# Altium PCB Copy of Sensor_board.PcbDoc
Units mil, origin at the board's own origin, x right, y up, seen from the top; angles counter-clockwise.
Board outline 4712.5 x 1045 mil, 2 copper layers (Top Layer, Bottom Layer); 60 components, 50 nets, 176 pads, 0 vias.
Unrouted connection lines stored in the file: 3.
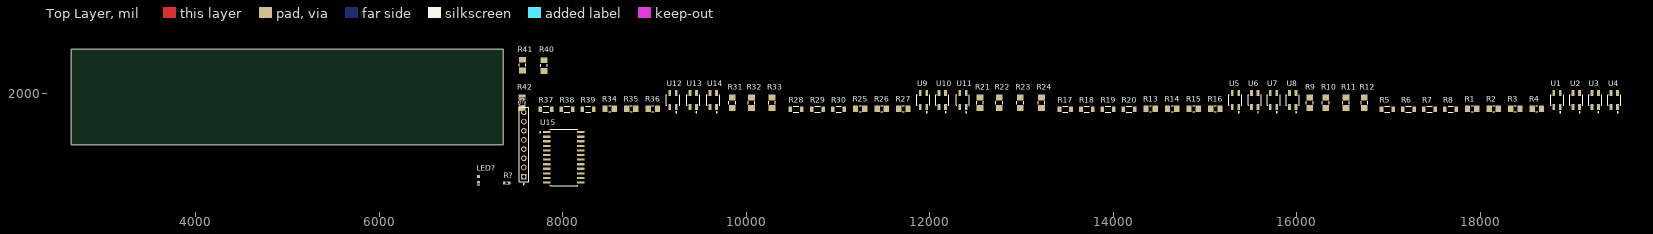
[diagram p0: Top Layer view]
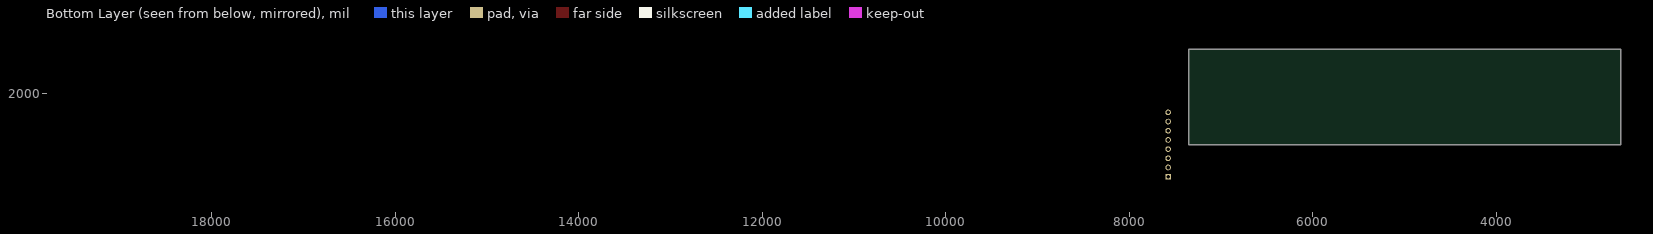
[diagram p1: Bottom Layer view, seen from below]

## Layer stack, top to bottom
Top Solder: solder mask 0.4, Solder Resist, Dk 3.5
Top Layer: signal copper 1.4
Dielectric 1: dielectric 12.6, FR-4, Dk 4.8
Bottom Layer: signal copper 1.4
Bottom Solder: solder mask 0.4, Solder Resist, Dk 3.5

## Board outline
2640,1440 2640,2485 7352.5,2485 7352.5,1440

## Design rules (kind name [scope] priority, off if disabled: settings)
Clearance [All] p1: gap=10 ignorepadtopadclearanceinfootprint=FALSE
PolygonConnect [All] p1: connectstyle=Relief reliefconductorwidth=10 reliefentries=4 polygonreliefangle="90 Angle" airgapwidth=10
RoutingVias [All] p1: holewidth=28 width=50 viastyle="Through Hole" minholewidth=28 minwidth=50 maxholewidth=28 maxwidth=50
SolderMaskExpansion [All] p1: expansion=4 istentingtop=FALSE
SupplyNets "Schematic Supply Nets_15" [InNet('sense_8')] p1: voltage=0.000
SupplyNets "Schematic Supply Nets_14" [InNet('sense_14')] p2: voltage=0.000
SupplyNets "Schematic Supply Nets_13" [InNet('sense_5')] p3: voltage=0.000
SupplyNets "Schematic Supply Nets_12" [InNet('sense_9')] p4: voltage=0.000
SupplyNets "Schematic Supply Nets_11" [InNet('GND')] p5: voltage=0.000
SupplyNets "Schematic Supply Nets_10" [InNet('sense_13')] p6: voltage=0.000
SupplyNets "Schematic Supply Nets_9" [InNet('+5')] p7: voltage=0.000
SupplyNets "Schematic Supply Nets_8" [InNet('sense_6')] p8: voltage=0.000
SupplyNets "Schematic Supply Nets_7" [InNet('sense_3')] p9: voltage=0.000
SupplyNets "Schematic Supply Nets_6" [InNet('sense_1')] p10: voltage=0.000
SupplyNets "Schematic Supply Nets_5" [InNet('sense_12')] p11: voltage=0.000
SupplyNets "Schematic Supply Nets_4" [InNet('sense_2')] p12: voltage=0.000
SupplyNets "Schematic Supply Nets_3" [InNet('sense_4')] p13: voltage=0.000
SupplyNets "Schematic Supply Nets_2" [InNet('sense_7')] p14: voltage=0.000
SupplyNets "Schematic Supply Nets_1" [InNet('sense_11')] p15: voltage=0.000
SupplyNets "Schematic Supply Nets" [InNet('sense_10')] p16: voltage=0.000
Width [All] p1: maxlimit=10 minlimit=10 preferedwidth=10
30 further rules are at their usual default settings.

## Components (designator, comment, footprint, x,y, rotation, side; value= is the part's Value field where it differs from the comment)
J? "TSW-108-08-G-S" FP-TSW-108-08-G-S-MFG 7575,1445 r90 top
LED? "2V 20mA 0603 Red" 0603_A 7080,1065 r90 top
R1 "RNCP1206FTD200R" FP-RNCP1206-IPC_B 17910,1835 r0 top
R2 "RNCP1206FTD200R" FP-RNCP1206-IPC_B 18145,1835 r0 top
R3 "RNCP1206FTD200R" FP-RNCP1206-IPC_B 18380,1835 r0 top
R4 "RNCP1206FTD200R" FP-RNCP1206-IPC_B 18615,1835 r0 top
R5 "SR1206FR-7W22RL" FP-SR1206-MFG 16985,1830 r0 top value=22Ω
R6 "SR1206FR-7W22RL" FP-SR1206-MFG 17215,1830 r0 top value=22Ω
R7 "SR1206FR-7W22RL" FP-SR1206-MFG 17445,1830 r0 top value=22Ω
R8 "SR1206FR-7W22RL" FP-SR1206-MFG 17675,1830 r0 top value=22Ω
R9 "RMCF1206JG220R" FP-RMCF1206-IPC_A 16140,1900 r90 top
R10 "RMCF1206JG220R" FP-RMCF1206-IPC_A 16315,1900 r90 top
R11 "RMCF1206JG220R" FP-RMCF1206-IPC_A 16535,1900 r90 top
R12 "RMCF1206JG220R" FP-RMCF1206-IPC_A 16735,1900 r90 top
R13 "RNCP1206FTD200R" FP-RNCP1206-IPC_B 14405,1835 r0 top
R14 "RNCP1206FTD200R" FP-RNCP1206-IPC_B 14640,1835 r0 top
R15 "RNCP1206FTD200R" FP-RNCP1206-IPC_B 14875,1835 r0 top
R16 "RNCP1206FTD200R" FP-RNCP1206-IPC_B 15110,1835 r0 top
R17 "SR1206FR-7W22RL" FP-SR1206-MFG 13475,1830 r0 top value=22Ω
R18 "SR1206FR-7W22RL" FP-SR1206-MFG 13710,1830 r0 top value=22Ω
R19 "SR1206FR-7W22RL" FP-SR1206-MFG 13940,1830 r0 top value=22Ω
R20 "SR1206FR-7W22RL" FP-SR1206-MFG 14170,1830 r0 top value=22Ω
R21 "RMCF1206JG220R" FP-RMCF1206-IPC_A 12545,1900 r90 top
R22 "RMCF1206JG220R" FP-RMCF1206-IPC_A 12755,1900 r90 top
R23 "RMCF1206JG220R" FP-RMCF1206-IPC_A 12985,1900 r90 top
R24 "RMCF1206JG220R" FP-RMCF1206-IPC_A 13215,1900 r90 top
R25 "RNCP1206FTD200R" FP-RNCP1206-IPC_B 11240,1835 r0 top
R26 "RNCP1206FTD200R" FP-RNCP1206-IPC_B 11475,1835 r0 top
R27 "RNCP1206FTD200R" FP-RNCP1206-IPC_B 11710,1835 r0 top
R28 "SR1206FR-7W22RL" FP-SR1206-MFG 10540,1830 r0 top value=22Ω
R29 "SR1206FR-7W22RL" FP-SR1206-MFG 10775,1830 r0 top value=22Ω
R30 "SR1206FR-7W22RL" FP-SR1206-MFG 11005,1830 r0 top value=22Ω
R31 "RMCF1206JG220R" FP-RMCF1206-IPC_A 9845,1900 r90 top
R32 "RMCF1206JG220R" FP-RMCF1206-IPC_A 10055,1900 r90 top
R33 "RMCF1206JG220R" FP-RMCF1206-IPC_A 10280,1900 r90 top
R34 "RNCP1206FTD200R" FP-RNCP1206-IPC_B 8510,1835 r0 top
R35 "RNCP1206FTD200R" FP-RNCP1206-IPC_B 8745,1835 r0 top
R36 "RNCP1206FTD200R" FP-RNCP1206-IPC_B 8980,1835 r0 top
R37 "SR1206FR-7W22RL" FP-SR1206-MFG 7815,1830 r0 top value=22Ω
R38 "SR1206FR-7W22RL" FP-SR1206-MFG 8045,1830 r0 top value=22Ω
R39 "SR1206FR-7W22RL" FP-SR1206-MFG 8275,1830 r0 top value=22Ω
R40 "RMCF1206JG220R" FP-RMCF1206-IPC_A 7795,2305 r90 top
R41 "RMCF1206JG220R" FP-RMCF1206-IPC_A 7560,2310 r90 top
R42 "RMCF1206JG220R" FP-RMCF1206-IPC_A 7555,1900 r90 top
R? "150R 5% 0603(1608)" RESC0603(1608)_L 7390,1025 r0 top value="150.00 Ohm"
U1 "QRE1113GR" FP-100CY-MFG 18835,1930 r90 top
U2 "QRE1113GR" FP-100CY-MFG 19045,1930 r90 top
U3 "QRE1113GR" FP-100CY-MFG 19250,1930 r90 top
U4 "QRE1113GR" FP-100CY-MFG 19460,1930 r90 top
U5 "QRE1113GR" FP-100CY-MFG 15330,1930 r90 top
U6 "QRE1113GR" FP-100CY-MFG 15540,1930 r90 top
U7 "QRE1113GR" FP-100CY-MFG 15745,1930 r90 top
U8 "QRE1113GR" FP-100CY-MFG 15955,1930 r90 top
U9 "QRE1113GR" FP-100CY-MFG 11930,1930 r90 top
U10 "QRE1113GR" FP-100CY-MFG 12135,1930 r90 top
U11 "QRE1113GR" FP-100CY-MFG 12360,1930 r90 top
U12 "QRE1113GR" FP-100CY-MFG 9200,1930 r90 top
U13 "QRE1113GR" FP-100CY-MFG 9420,1930 r90 top
U14 "QRE1113GR" FP-100CY-MFG 9640,1930 r90 top
U15 "CD74HC4067M96" FP-DW0024A-MFG 8010,1305 r0 top

## Footprints (in the part's own frame and the unit in brackets; to place one, negate y for a bottom-side part, rotate by r counter-clockwise, add the part's x,y. Pads: shape width x height; smd on the part's side, far side on the other; paste and mask are expansions set on the pad)
0603_A [mm] "Chip LED, 2-Leads, Body 1.6x0.8mm, IPC Medium Density"
  rect 0.8x0.8 smd: 1(-0.8,0) 2(0.8,0)
  silkscreen extent -1.5,-0.3 -1.5,0.3, body extent -0.8,-0.4 0.8,0.4, height 0.7
FP-100CY-MFG [mm]
  rect 1.66x0.79 smd paste+0 mask+0: 1(-2,-0.9) 2(2,-0.9) 3(2,0.9) 4(-2,0.9)
  silkscreen extent -3.52,-1.8 1.45,1.8, body extent -2.93,-1.9 2.93,1.9, height 0.25
FP-DW0024A-MFG [mm]
  rect 2x0.6 smd paste-1000 mask+0: 1(-4.7,6.985) 2(-4.7,5.715) 3(-4.7,4.445) 4(-4.7,3.175) 5(-4.7,1.905) 6(-4.7,0.635) 7(-4.7,-0.635) 8(-4.7,-1.905) 9(-4.7,-3.175) 10(-4.7,-4.445) 11(-4.7,-5.715) 12(-4.7,-6.985) 13(4.7,-6.985) 14(4.7,-5.715) 15(4.7,-4.445) 16(4.7,-3.175) 17(4.7,-1.905) 18(4.7,-0.635) 19(4.7,0.635) 20(4.7,1.905) 21(4.7,3.175) 22(4.7,4.445) 23(4.7,5.715) 24(4.7,6.985)
  silkscreen extent -6.7,-7.8 3.8,7.8, body extent -5.8,-7.98 5.8,7.98, height 0.25
FP-RMCF1206-IPC_A [mil]
  rect 63.14x73.16 smd paste+0 mask+0: 1(-58.09,0) 2(58.09,0)
  silkscreen extent -15,-37 15,37, body extent -109,-56 109,56, height 10
FP-RNCP1206-IPC_B [mil]
  rect 57.26x67.17 smd paste+0 mask+0: 1(-50.23,0) 2(50.23,0)
  silkscreen extent -10,-34 10,34, body extent -89,-43 89,43, height 10
FP-SR1206-MFG [mm]
  rect 1x1.5 smd paste+0 mask+0: 1(-1.6,0) 2(1.6,0)
  silkscreen extent -0.72,-0.85 0.72,0.85, body extent -2.2,-0.95 2.2,0.95, height 0.25
FP-TSW-108-08-G-S-MFG [mm]
  rect 1.57x1.57 hole 1.02 paste-2539.97 mask+0: 1(-8.89,0)
  round 1.57 hole 1.02 paste-2539.97 mask+0: 2(-6.35,0) 3(-3.81,0) 4(-1.27,0) 5(1.27,0) 6(3.81,0) 7(6.35,0) 8(8.89,0)
  silkscreen extent -11.07,-1.34 10.35,1.34, body extent -10.45,-1.44 10.45,1.44, height 0.25
RESC0603(1608)_L [mm] "Chip Resistor, Body 1.6x0.8mm, IPC High Density"
  rect 0.7x0.9 smd: 1(-0.7,0) 2(0.7,0)
  silkscreen extent -0.05,-0.35 0.05,0.35, body extent -0.85,-0.47 0.85,0.47, height 0.6

## Part data
J?: library part CMP-02766-000001-1, "CONN HEADER VERT 8POS 2.54MM", Manufacturer=Samtec, Temperature="-55°C to +125°C", Temperature Range High=+125°C, Temperature Range Low=-55°C, Automotive=No, Category=Conn, ComponentLink2Description=Datasheet, ComponentLink2URL=http://suddendocs.samtec.com/catalog_english/tsw_th.pdf, Conn Gender=Male, Conn Orientation=Straight, Contact Material=Gold,Nickel, Device Class L1=Connectors, Device Class L2="Headers and Wire Housings", Device Class L3=unset, Digikey Description="CONN HEADER VERT 8POS 2.54MM", Footprint Url=http://suddendocs.samtec.com/prints/tsw-xxx-xx-x-x-xx-xxx-footprint.pdf, Height=8.71mm, Lead Free=Yes, Manufacturer Part Number=TSW-108-08-G-S, Mouser Description="TSW - Samtec 2.54mm Pin Header 13.46mm Overall Pin Length 5.08mm Tail", Number Of Contacts=8, Number Of Rows=1, Octopart=https://octopart.com/tsw-108-08-g-s-samtec-272653, Package=TSW-108-08-G-S, Pitch=2.54mm, RoHS=TRUE
LED?: library part CMP-1426-00001-1, "SMD mono-color Chip LED, WL-SMCW, Red", Color=Red, Manufacturer="Wuerth Elektronik", PartNumber=150060RS75000, ComponentLink1Description="Manufacturer URL", ComponentLink1URL=http://www.we-online.com, ComponentLink2Description=Datasheet, ComponentLink2URL=http://katalog.we-online.com/led/datasheet/150060RS75000.pdf, PackageReference=0603_A
R1 R2 R3 R4 R13 R14 R15 R16 R25 R26 R27 R34 R35 R36: library part CMP-26527-001516-1, "200Ω ±1% 0.5W 1206 High Power Anti-Sulfur Thin Film Chip Resistor", Case Code (Imperial)=1206, Case Code (Metric)=3216, Max Operating Temperature=155°C, Max Power Dissipation=500mW, Min Operating Temperature=-55°C, Resistance=200R, Resistor Type="Thin Film", Temperature Coefficient=100ppm/°C, Tolerance=1%, Case/Package=1206, Features="Moisture Resistant", Height=0.024inch, Lead Free="Lead Free", Length=0.122inch, Mount="Surface Mount", Number of Terminations=2, Packaging="Tape and Reel", RoHS Compliant=Yes, Series=RNCP, Width=0.059inch
R5 R6 R7 R8 R17 R18 R19 R20 R28 R29 R30 R37 R38 R39: library part CMP-03412-023562-1, "RES 22 OHM 1% 1/2W 1206", Manufacturer=Yageo, Package=SR1206, Power Rating=0.5W, Resistance=22Ω, Temperature="-55°C to +155°C", Temperature Range High=+155°C, Temperature Range Low=-55°C, Tolerance=0.01, Voltage Rating=200V, Automotive=Yes, Automotive Grade="Grade 0", Category=Res, ComponentLink2Description=Datasheet, ComponentLink2URL=http://www.yageo.com/documents/recent/PYu-SR_D_F%20tol_RoHS_L_3.pdf, Composition="Thick Film", Device Class L1="Passive Components", Device Class L2=Resistors, Device Class L3="Chip SMD Resistors", Digikey Description="RES 22 OHM 1% 1/2W 1206", Footprint Url=http://www.yageo.com/exep/pages/download/literatures/PYu-R_Mount_10.pdf, Height=0.65mm, Ipc Land Pattern Name=RESC310160X55, Lead Free=Yes, Manufacturer Part Number=SR1206FR-7W22RL, Octopart=https://octopart.com/sr1206fr-7w22rl-yageo-92673882, RoHS=TRUE, Series=SR
R9 R10 R11 R12 R21 R22 R23 R24 R31 R32 R33 R40 R41 R42: library part CMP-26527-005266-1, "220Ω ±5% 0.25W 1206 Thick Film Chip Resistor AEC-Q200 compliant", Case Code (Imperial)=1206, Case Code (Metric)=3216, Max Operating Temperature=155°C, Max Power Dissipation=250mW, Min Operating Temperature=-55°C, Package Quantity=10000, Resistance=220R, Resistor Type="Thick Film", Temperature Coefficient=200ppm/°C, Tolerance=5%, Case/Package=1206, Contact Plating=Tin, Features="Automotive AEC-Q200", Height=0.028inch, Length=0.126inch, Mount="Surface Mount", Number of Terminations=2, Packaging="Tape and Reel", Radiation Hardening=No, RoHS Compliant=Yes, Series=RMCF, Width=0.063inch
R?: library part CMP-1012-00054-1, "150R 0.1W 5% 0603 (1608 Metric)  SMD", Case-EIA=0603, Case-Metric=1608, Power="0.1 W", Tolerance="5 %", Technology=SMT
U1 U2 U3 U4 U5 U6 U7 U8 U9 U10 U11 U12 U13 U14: library part CMP-2000-06919-2, "SENSOR OPTO TRANS REFL SMD PHOTO", Case/Package=SMD/SMT, Collector Emitter Breakdown Voltage=30V, Forward Current=50mA, Forward Voltage=1.2V, Max Collector Current=20mA, Max Operating Temperature=85°C, Max Power Dissipation=75mW, Min Operating Temperature=-40°C, Operating Supply Voltage=1.7V, Package Quantity=1000, Reverse Breakdown Voltage=5V, Collector Emitter Voltage (VCEO)=30V, Contact Plating=Tin, Fall Time=20us, Height=1.7mm, Input Current=50mA, Lead Free="Lead Free", Length=3.6mm, Max Breakdown Voltage=30V, Mount="Surface Mount", Number of Channels=1, Number of Elements=1, Number of Pins=4, Output Type=Phototransistor, Packaging="Tape and Reel", Power Dissipation=75mW, Radiation Hardening=No, REACH SVHC="No SVHC", Response Time=20us, Reverse Voltage (DC)=5V, Rise Time=20us, Sensing Distance=0.197inch, Wavelength=940nm, Weight=0.078g, Width=2.9mm
U15: library part CMP-04901-000007-1, "IC MUX/DEMUX 1X16 24SOIC", Ambient Temperature Range High=+125°C, Ambient Temperature Range Low=-55°C, Manufacturer="Texas Instruments", Max Junction Temp=+150°C, Max Supply Voltage=6V, Min Supply Voltage=2V, Package=DW0024A, Quiescent Current=8uA, Temperature="-55°C to +125°C", Automotive=No, Category=IC, ComponentLink2Description=Datasheet, ComponentLink2URL=http://www.ti.com/lit/ds/symlink/cd74hc4067.pdf, Device Class L1="Integrated Circuits (ICs)", Device Class L2="Logic ICs", Device Class L3=Multiplexers, Digikey Description="IC MUX/DEMUX 1X16 24SOIC", Height=2.65mm, Ipc Land Pattern Name=SOIC127P1030X265-24, Lead Free=Yes, Logic Function Desc=Non-Inverting, Manufacturer Part Number=CD74HC4067M96, Mouser Description="Multiplexer Switch ICs Hi-Spd CMOS 16Ch Anl Mltplxr/Demltplxr", Number Of Circuits=1, Number Of Inputs=16, Number Of Outputs=1, Octopart=https://octopart.com/cd74hc4067m96-texas+instruments-722802, Propagation Delay=6ns, RoHS=TRUE, Standoff Height=0.1mm, Temperature Range High=+125°C, Temperature Range Low=-55°C

## Nets (pads, with @x,y where several pads share a name; then routed paths per layer and width w, separated by ;. In a path a pad name is that pad's centre, name@x,y a point inside that pad or via, vN(x,y) a via of type N, cw(c..) or ccw(c..) an arc to the next point about the centre after c; other vN are vias at no path point)
+5: U15.24
GND: U15.12 U15.15 U15.16 U15.17
MUX_OUTPUT: U15.1
NetLED?_2: 
NetR1_1: 
NetR2_1: 
NetR3_1: 
NetR4_1: 
NetR5_1: 
NetR6_1: 
NetR7_1: 
NetR8_1: 
NetR13_1: 
NetR14_1: 
NetR15_1: 
NetR16_1: 
NetR17_1: 
NetR18_1: 
NetR19_1: 
NetR20_1: 
NetR25_1: 
NetR26_1: 
NetR27_1: 
NetR28_1: 
NetR29_1: 
NetR30_1: 
NetR34_1: 
NetR35_1: 
NetR36_1: 
NetR37_1: 
NetR38_1: 
NetR39_1: 
SENS_MUX_A: U15.10
SENS_MUX_B: U15.11
SENS_MUX_C: U15.14
SENS_MUX_D: U15.13
sense_1: U15.9
sense_2: U15.8
sense_3: U15.7
sense_4: U15.6
sense_5: U15.5
sense_6: U15.4
sense_7: U15.3
sense_8: U15.2
sense_9: U15.23
sense_10: U15.22
sense_11: U15.21
sense_12: U15.20
sense_13: U15.19
sense_14: U15.18
pads on no net: J?.1 J?.2 J?.3 J?.4 J?.5 J?.6 J?.7 J?.8 LED?.1 LED?.2 R1.1 R1.2 R2.1 R2.2 R3.1 R3.2 R4.1 R4.2 R5.1 R5.2 R6.1 R6.2 R7.1 R7.2 R8.1 R8.2 R9.1 R9.2 R10.1 R10.2 R11.1 R11.2 R12.1 R12.2 R13.1 R13.2 R14.1 R14.2 R15.1 R15.2 R16.1 R16.2 R17.1 R17.2 R18.1 R18.2 R19.1 R19.2 R20.1 R20.2 R21.1 R21.2 R22.1 R22.2 R23.1 R23.2 R24.1 R24.2 R25.1 R25.2 R26.1 R26.2 R27.1 R27.2 R28.1 R28.2 R29.1 R29.2 R30.1 R30.2 R31.1 R31.2 R32.1 R32.2 R33.1 R33.2 R34.1 R34.2 R35.1 R35.2 R36.1 R36.2 R37.1 R37.2 R38.1 R38.2 R39.1 R39.2 R40.1 R40.2 R41.1 R41.2 R42.1 R42.2 R?.1 R?.2 U1.1 U1.2 U1.3 U1.4 U2.1 U2.2 U2.3 U2.4 U3.1 U3.2 U3.3 U3.4 U4.1 U4.2 U4.3 U4.4 U5.1 U5.2 U5.3 U5.4 U6.1 U6.2 U6.3 U6.4 U7.1 U7.2 U7.3 U7.4 U8.1 U8.2 U8.3 U8.4 U9.1 U9.2 U9.3 U9.4 U10.1 U10.2 U10.3 U10.4 U11.1 U11.2 U11.3 U11.4 U12.1 U12.2 U12.3 U12.4 U13.1 U13.2 U13.3 U13.4 U14.1 U14.2 U14.3 U14.4

## Silkscreen, mask and mechanical layers (free items; w line width, h text height)
Mechanical 1:
  lines w10: 5785,2075 5150,1440 4840,1440 4200,2080 2705,2080 cw(c2705,2145) 2640,2145 2640,2420 cw(c2705,2420) 2705,2485 7285,2485 cw(c7285,2420) 7350,2420 7350,2145 cw(c7285,2145) 7285,2080 5790,2080